# EAGLE board power mux-v3 (EAGLE 6.5.0)
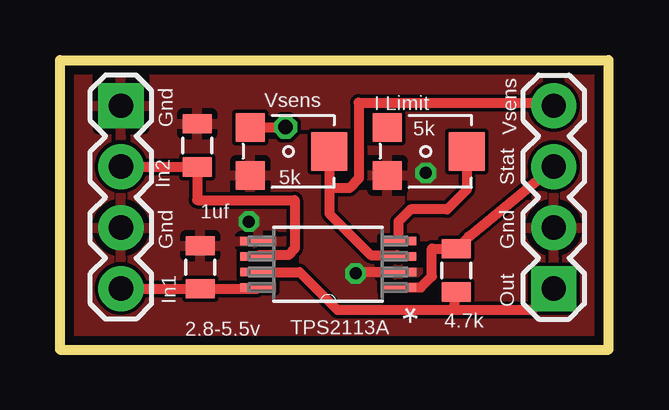
[diagram p0: board, top side]
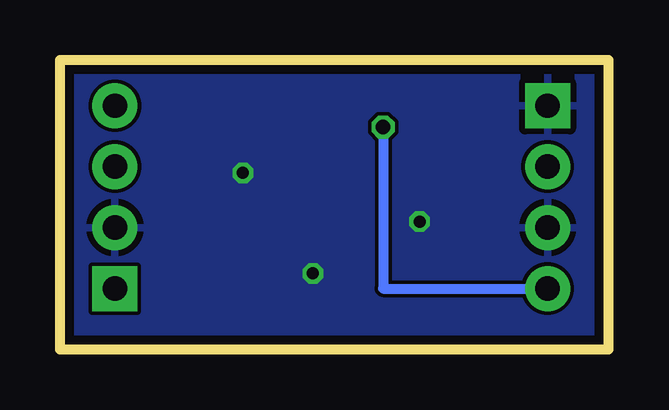
[diagram p1: board, bottom side, seen from below]

Size 22.86 x 12.06 mm. Coordinates in mm from the lower left corner, seen from the top.
Outline: 0,0 0,12.06 22.86,12.06 22.86,0 0,0
Copper layers (1*16): Top 0.0356mm / dielectric 1.5011mm / Bottom 0.0356mm
Design rules "LaenPCBOrder": minimum track width 6mil, minimum drill 13mil, track to track 6mil, track to pad 6mil, pad to pad 6mil, via to via 6mil, smd to smd 6mil, copper to edge 15mil, drill to drill 6mil, minimum pad ring 7mil, minimum via ring 7mil, stop-mask expansion 3mil, vias tented up to drill 0mil, thermal gap 10mil

## Footprints (pad centres in the part's own frame; a part is rotated, then mirrored left to right if it is on the bottom)
0805 = smd 0.8 x 1.2: 1 -0.9,0; 2 0.9,0
1X04 = drill 1.016 pad 1.88 square: 1 0,0 | drill 1.016 pad 1.88: 2 2.54,0; 3 5.08,0; 4 7.62,0
SOP65P640X120-8N = smd 1.473 x 0.356: 1 -2.921,0.965; 2 -2.921,0.33; 3 -2.921,-0.33; 4 -2.921,-0.965; 5 2.921,-0.965; 6 2.921,-0.33; 7 2.921,0.33; 8 2.921,0.965
TC33X-2 = smd 1.2 x 1.2: I1 -1,-1.6; O1 1,-1.6 | smd 1.6 x 1.5: V 0,1.7

## Placement (x,y rotation side)
C1  [0805]  5.84,3.43 90 top
C2  [0805]  5.71,8.51 90 top
JP1  [1X04]  20.57,2.54 90 top
JP2  [1X04]  2.54,10.16 270 top
R1  4.7k  [0805]  16.51,3.3 270 top
U1  TPS2113APWR  [SOP65P640X120-8N]  11.18,3.56 180 top
U$1  TC33X-2  [TC33X-2]  9.53,8.26 270 top
U$2  TC33X-2  [TC33X-2]  15.24,8.26 270 top

## Library data of the parts
C1 C2 = SparkFun-Capacitors
JP1 JP2 = SparkFun-Connectors
R1 = SparkFun-Passives
U1 = Texas Instruments_By_element14_Batch_1; MPN: TPS2113APWR; OC_FARNELL: 1757288; OC_NEWARK: 01J0961; PACKAGE: TSSOP-8; SUPPLIER: TEXAS INSTRUMENTS
U$1 U$2 = Richards

## Nets
GND: C1.2 C2.2 JP1.2 JP2.1 JP2.3 U1.2 U1.5 U$1.O1 U$2.O1
ILIM: U1.4 U$2.V
IN1: C1.1 JP2.4 U1.8 U$1.I1
IN2: C2.1 JP2.2 U1.6
OUT: JP1.1 R1.2 U1.7
STAT: JP1.3 R1.1 U1.1
VSENS: JP1.4 U1.3 U$1.V

## Tracks (layer width: path | path; a pad name or v marks a point on that pad's centre or on a via)
GND  (via drill 0.5)
  Top 0.406: U1.2 12.5,3.23 12.45,3.17
  other vias: 12.32,3.17 15.24,7.37 7.87,5.33
  pour Bottom: 0,12.06 0,0 22.86,0 22.86,12.06
  pour Top: 0,0 22.86,0 22.86,12.06 0,12.06
ILIM
  Top 0.406: U1.4 14.1,5.33 14.61,5.84 16.13,5.84 16.94,6.65 U$2.V
IN1  (via drill 0.6)
  Top 0.406: JP2.4 C1.1 8.19,2.53 U1.8 | U$1.I1 9.38,9.26 v9.4,9.27
  Bottom 0.406: v9.4,9.27 9.4,2.54 JP2.4
IN2
  Top 0.406: JP2.2 C2.1 5.71,6.22 9.78,6.22 9.78,4.19 9.53,3.94 8.31,3.94 U1.6
OUT
  Top 0.406: U1.7 9.98,3.23 11.56,1.65 16.38,1.65 | 16.38,1.65 19.68,1.65 JP1.1 | R1.2 16.38,1.65
STAT
  Top 0.406: U1.1 15.04,2.59 15.49,3.05 15.49,4.2 R1.1 17.03,4.71 JP1.3
VSENS
  Top 0.406: U1.3 14.05,3.94 12.95,3.94 11.22,5.67 11.22,6.73 | U$1.V 11.22,6.73 | 11.22,6.73 12.06,6.73 12.45,7.11 12.45,10.29 20.45,10.29 JP1.4

## Text on the board
tPlace: Vsens | Vsens | I Limit | 5k | Gnd | In2 | 5k | Stat | 1uf | Gnd | Gnd | In1 | 4.7k | Out | 2.8-5.5v | TPS2113A